# Altium PCB ConnAdaptor.PcbDoc
Units mm, origin at the board's own origin, x right, y up, seen from the top; angles counter-clockwise.
Board outline 92.27 x 10.53 mm, 2 copper layers (Top Layer, Bottom Layer); 2 components, 0 nets, 144 pads, 0 vias.
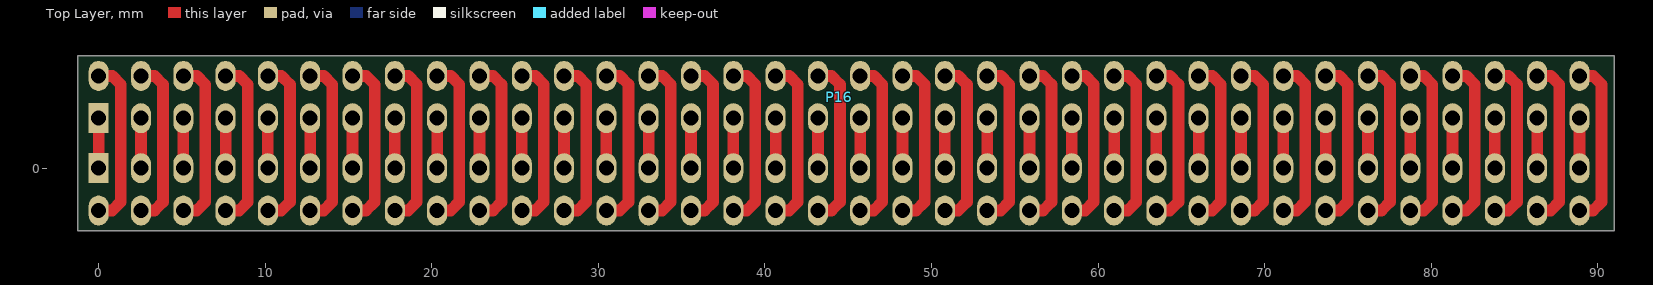
[diagram p0: Top Layer view]
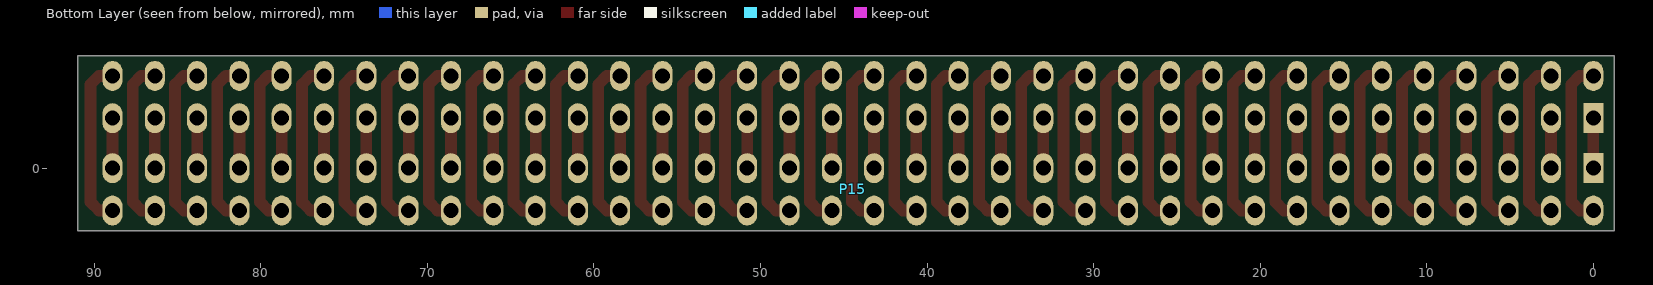
[diagram p1: Bottom Layer view, seen from below]

## Layer stack, top to bottom
Top Solder: solder mask 0.0102, Solder Resist, Dk 3.5
Top Layer: signal copper 0.0356
Dielectric1: dielectric 0.32, FR-4, Dk 4.8
Bottom Layer: signal copper 0.0356
Bottom Solder: solder mask 0.0102, Solder Resist, Dk 3.5

## Board outline
-1.27,-3.765 -1.27,6.765 91,6.765 91,-3.765

## Design rules (kind name [scope] priority, off if disabled: settings)
AcuteAngle [All] p1 off: minimum=8.80000000000000E+0001 checktracksonly=FALSE
Clearance Clearance_Normal [All] p1: gap=0.15 ignorepadtopadclearanceinfootprint=FALSE except(0: Arc-Hole Track-Hole SMDPad-Hole THPad-Hole Via-Hole Fill-Hole Poly-Hole Region-Hole Text-Hole)
ComponentClearance [All] p1: gap=0.2 collisioncheckmode=3 verticalgap=0.2 showdistances=FALSE
FabricationTestPointUsage TestPointUsage [All] p1: valid=0 allowmultiple=FALSE
FabricationTestpoint Testpoint [All] p1: side=3 testpointundercomponent=TRUE minsize=1.016 maxsize=2.54 preferedsize=1.524 minholesize=0 maxholesize=1.016 preferedholesize=0.813 testpointgrid=0.025 allowsidetop=TRUE allowsidebottom=TRUE usegrid=TRUE gridtolerance=0
Height [All] p1 off: minheight=0 maxheight=25.4 prefheight=12.7
HoleSize [All] p1: absolutevalues=TRUE maxlimit=6 minlimit=0.3 maxpercent=80.000 minpercent=20.000
MinimumAnnularRing [All] p1: minimumring=0.15
MinimumSolderMaskSliver [All] p1: minsoldermaskwidth=0.2
PlaneClearance [All] p1: clearance=0.4
PlaneConnect [All] p1: planeconnectstyle=Relief reliefexpansion=0.508 reliefentries=4 reliefconductorwidth=0.2 reliefairgap=0.254
PolygonConnect PolygonConnect_Via [IsVia] p1: connectstyle=Direct reliefconductorwidth=0.254 reliefentries=4 polygonreliefangle="90 Angle" airgapwidth=0.254
PolygonConnect [All] p2: connectstyle=Relief reliefconductorwidth=0.2 reliefentries=4 polygonreliefangle="90 Angle" airgapwidth=0.254
RoutingCorners [All] p1: cornerstyle=45-Degree minsetback=1 maxsetback=2.54
RoutingVias [All] p1: holewidth=0.3 width=0.6 viastyle="Through Hole" minholewidth=0.3 minwidth=0.6 maxholewidth=1 maxwidth=4
SMDToCorner [All] p1 off: distance=78740
SMDToPlane [All] p1 off: distance=118110
SilkToSilkClearance [All] p1: silktosilkclearance=0.2
SilkToSolderMaskClearance SilkscreenOverComponentPads [IsPad] p1: minsilkscreentomaskgap=0.2 clearancetoexposedcopper=TRUE
SolderMaskExpansion SolderMaskExpansion_Via [isVia] p1: expansion=-5
SolderMaskExpansion [All] p2: expansion=0.05
ViasUnderSMD [All] p1: allowed=FALSE
Width [All] p1: maxlimit=5 minlimit=0.15 preferedwidth=0.2 minimp=50.000000 maximp=50.000000 favimp=50.000000
19 further rules are at their usual default settings.

## Components (designator, comment, footprint, x,y, rotation, side; value= is the part's Value field where it differs from the comment)
P15 "Header 2x36" HEADER2x36-2.54 0,0 r0 bottom
P16 "Header 2x36" HEADER2x36-2.54 0,3 r0 top (schematic designator P15)

## Footprints (in the part's own frame and the unit in brackets; to place one, negate y for a bottom-side part, rotate by r counter-clockwise, add the part's x,y. Pads: shape width x height; smd on the part's side, far side on the other; paste and mask are expansions set on the pad)
HEADER2x36-2.54 [mm] "Connector; Header; 50 Positions"
  rect 1.2x1.8 hole 0.9: 1(0,0)
  oval 1.2x1.8 hole 0.9: 2(0,2.54) 3(2.54,0) 4(2.54,2.54) 5(5.08,0) 6(5.08,2.54) 7(7.62,0) 8(7.62,2.54) 9(10.16,0) 10(10.16,2.54) 11(12.7,0) 12(12.7,2.54) 13(15.24,0) 14(15.24,2.54) 15(17.78,0) 16(17.78,2.54) 17(20.32,0) 18(20.32,2.54) 19(22.86,0) 20(22.86,2.54) 21(25.4,0) 22(25.4,2.54) 23(27.94,0) 24(27.94,2.54) 25(30.48,0) 26(30.48,2.54) 27(33.02,0) 28(33.02,2.54) 29(35.56,0) 30(35.56,2.54) 31(38.1,0) 32(38.1,2.54) 33(40.64,0) 34(40.64,2.54) 35(43.18,0) 36(43.18,2.54) 37(45.72,0) 38(45.72,2.54) 39(48.26,0) 40(48.26,2.54) 41(50.8,0) 42(50.8,2.54) 43(53.34,0) 44(53.34,2.54) 45(55.88,0) 46(55.88,2.54) 47(58.42,0) 48(58.42,2.54) 49(60.96,0) 50(60.96,2.54) 51(63.5,0) 52(63.5,2.54) 53(66.04,0) 54(66.04,2.54) 55(68.58,0) 56(68.58,2.54) 57(71.12,0) 58(71.12,2.54) 59(73.66,0) 60(73.66,2.54) 61(76.2,0) 62(76.2,2.54) 63(78.74,0) 64(78.74,2.54) 65(81.28,0) 66(81.28,2.54) 67(83.82,0) 68(83.82,2.54) 69(86.36,0) 70(86.36,2.54) 71(88.9,0) 72(88.9,2.54)

## Nets (pads, with @x,y where several pads share a name; then routed paths per layer and width w, separated by ;. In a path a pad name is that pad's centre, name@x,y a point inside that pad or via, vN(x,y) a via of type N, cw(c..) or ccw(c..) an arc to the next point about the centre after c; other vN are vias at no path point)
pads on no net: P15.1 P15.2 P15.3 P15.4 P15.5 P15.6 P15.7 P15.8 P15.9 P15.10 P15.11 P15.12 P15.13 P15.14 P15.15 P15.16 P15.17 P15.18 P15.19 P15.20 P15.21 P15.22 P15.23 P15.24 P15.25 P15.26 P15.27 P15.28 P15.29 P15.30 P15.31 P15.32 P15.33 P15.34 P15.35 P15.36 P15.37 P15.38 P15.39 P15.40 P15.41 P15.42 P15.43 P15.44 P15.45 P15.46 P15.47 P15.48 P15.49 P15.50 P15.51 P15.52 P15.53 P15.54 P15.55 P15.56 P15.57 P15.58 P15.59 P15.60 P15.61 P15.62 P15.63 P15.64 P15.65 P15.66 P15.67 P15.68 P15.69 P15.70 P15.71 P15.72 P16.1 P16.2 P16.3 P16.4 P16.5 P16.6 P16.7 P16.8 P16.9 P16.10 P16.11 P16.12 P16.13 P16.14 P16.15 P16.16 P16.17 P16.18 P16.19 P16.20 P16.21 P16.22 P16.23 P16.24 P16.25 P16.26 P16.27 P16.28 P16.29 P16.30 P16.31 P16.32 P16.33 P16.34 P16.35 P16.36 P16.37 P16.38 P16.39 P16.40 P16.41 P16.42 P16.43 P16.44 P16.45 P16.46 P16.47 P16.48 P16.49 P16.50 P16.51 P16.52 P16.53 P16.54 P16.55 P16.56 P16.57 P16.58 P16.59 P16.60 P16.61 P16.62 P16.63 P16.64 P16.65 P16.66 P16.67 P16.68 P16.69 P16.70 P16.71 P16.72
copper on no net: | length 469.1
  Top Layer w0.5: 1.325,-2.025 1.325,-1.925
  Top Layer w0.7: 0,-2.54 0.81,-2.54 1.325,-2.025 ; 0,0 0,3 ; 0,5.54 0.81,5.54 1.325,5.025 1.325,-1.925 ; 2.54,-2.54 3.35,-2.54 3.865,-2.025 ; 2.54,0 2.54,3 ; 2.54,5.54 3.35,5.54 3.865,5.025 3.865,-1.925 ; 5.08,-2.54 5.89,-2.54 6.405,-2.025 ; 5.08,0 5.08,3 ; 5.08,5.54 5.89,5.54 6.405,5.025 6.405,-1.925 ; 7.62,-2.54 8.43,-2.54 8.945,-2.025 ; 7.62,0 7.62,3 ; 7.62,5.54 8.43,5.54 8.945,5.025 8.945,-1.925 ; 10.16,-2.54 10.97,-2.54 11.485,-2.025 ; 10.16,0 10.16,3 ; 10.16,5.54 10.97,5.54 11.485,5.025 11.485,-1.925 ; 12.7,-2.54 13.51,-2.54 14.025,-2.025 ; 12.7,0 12.7,3 ; 12.7,5.54 13.51,5.54 14.025,5.025 14.025,-1.925 ; 15.24,-2.54 16.05,-2.54 16.565,-2.025 ; 15.24,0 15.24,3 ; 15.24,5.54 16.05,5.54 16.565,5.025 16.565,-1.925 ; 17.78,-2.54 18.59,-2.54 19.105,-2.025 ; 17.78,0 17.78,3 ; 17.78,5.54 18.59,5.54 19.105,5.025 19.105,-1.925 ; 20.32,-2.54 21.13,-2.54 21.645,-2.025 ; 20.32,0 20.32,3 ; 20.32,5.54 21.13,5.54 21.645,5.025 21.645,-1.925 ; 22.86,-2.54 23.67,-2.54 24.185,-2.025 ; 22.86,0 22.86,3 ; 22.86,5.54 23.67,5.54 24.185,5.025 24.185,-1.925 ; 25.4,-2.54 26.21,-2.54 26.725,-2.025 ; 25.4,0 25.4,3 ; 25.4,5.54 26.21,5.54 26.725,5.025 26.725,-1.925 ; 27.94,-2.54 28.75,-2.54 29.265,-2.025 ; 27.94,0 27.94,3 ; 27.94,5.54 28.75,5.54 29.265,5.025 29.265,-1.925 ; 30.48,-2.54 31.29,-2.54 31.805,-2.025 ; 30.48,0 30.48,3 ; 30.48,5.54 31.29,5.54 31.805,5.025 31.805,-1.925 ; 33.02,-2.54 33.83,-2.54 34.345,-2.025 ; 33.02,0 33.02,3 ; 33.02,5.54 33.83,5.54 34.345,5.025 34.345,-1.925 ; 35.56,-2.54 36.37,-2.54 36.885,-2.025 ; 35.56,0 35.56,3 ; 35.56,5.54 36.37,5.54 36.885,5.025 36.885,-1.925 ; 38.1,-2.54 38.91,-2.54 39.425,-2.025 ; 38.1,0 38.1,3 ; 38.1,5.54 38.91,5.54 39.425,5.025 39.425,-1.925 ; 40.64,-2.54 41.45,-2.54 41.965,-2.025 ; 40.64,0 40.64,3 ; 40.64,5.54 41.45,5.54 41.965,5.025 41.965,-1.925 ; 43.18,-2.54 43.99,-2.54 44.505,-2.025 ; 43.18,0 43.18,3 ; 43.18,5.54 43.99,5.54 44.505,5.025 44.505,-1.925 ; 45.72,-2.54 46.53,-2.54 47.045,-2.025 ; 45.72,0 45.72,3 ; 45.72,5.54 46.53,5.54 47.045,5.025 47.045,-1.925 ; 48.26,-2.54 49.07,-2.54 49.585,-2.025 ; 48.26,0 48.26,3 ; 48.26,5.54 49.07,5.54 49.585,5.025 49.585,-1.925 ; 50.8,-2.54 51.61,-2.54 52.125,-2.025 ; 50.8,0 50.8,3 ; 50.8,5.54 51.61,5.54 52.125,5.025 52.125,-1.925 ; 53.34,-2.54 54.15,-2.54 54.665,-2.025 ; 53.34,0 53.34,3 ; 53.34,5.54 54.15,5.54 54.665,5.025 54.665,-1.925 ; 55.88,-2.54 56.69,-2.54 57.205,-2.025 ; 55.88,0 55.88,3 ; 55.88,5.54 56.69,5.54 57.205,5.025 57.205,-1.925 ; 58.42,-2.54 59.23,-2.54 59.745,-2.025 ; 58.42,0 58.42,3 ; 58.42,5.54 59.23,5.54 59.745,5.025 59.745,-1.925 ; 60.96,-2.54 61.77,-2.54 62.285,-2.025 ; 60.96,0 60.96,3 ; 60.96,5.54 61.77,5.54 62.285,5.025 62.285,-1.925 ; 63.5,-2.54 64.31,-2.54 64.825,-2.025 ; 63.5,0 63.5,3 ; 63.5,5.54 64.31,5.54 64.825,5.025 64.825,-1.925 ; 66.04,-2.54 66.85,-2.54 67.365,-2.025 ; 66.04,0 66.04,3 ; 66.04,5.54 66.85,5.54 67.365,5.025 67.365,-1.925 ; 68.58,-2.54 69.39,-2.54 69.905,-2.025 ; 68.58,0 68.58,3 ; 68.58,5.54 69.39,5.54 69.905,5.025 69.905,-1.925 ; 71.12,-2.54 71.93,-2.54 72.445,-2.025 ; 71.12,0 71.12,3 ; 71.12,5.54 71.93,5.54 72.445,5.025 72.445,-1.925 ; 73.66,-2.54 74.47,-2.54 74.985,-2.025 ; 73.66,0 73.66,3 ; 73.66,5.54 74.47,5.54 74.985,5.025 74.985,-1.925 ; 76.2,-2.54 77.01,-2.54 77.525,-2.025 ; 76.2,0 76.2,3 ; 76.2,5.54 77.01,5.54 77.525,5.025 77.525,-1.925 ; 78.74,-2.54 79.55,-2.54 80.065,-2.025 ; 78.74,0 78.74,3 ; 78.74,5.54 79.55,5.54 80.065,5.025 80.065,-1.925 ; 81.28,-2.54 82.09,-2.54 82.605,-2.025 ; 81.28,0 81.28,3 ; 81.28,5.54 82.09,5.54 82.605,5.025 82.605,-1.925 ; 83.82,-2.54 84.63,-2.54 85.145,-2.025 ; 83.82,0 83.82,3 ; 83.82,5.54 84.63,5.54 85.145,5.025 85.145,-1.925 ; 86.36,-2.54 87.17,-2.54 87.685,-2.025 ; 86.36,0 86.36,3 ; 86.36,5.54 87.17,5.54 87.685,5.025 87.685,-1.925 ; 88.9,-2.54 89.71,-2.54 90.225,-2.025 ; 88.9,0 88.9,3 ; 88.9,5.54 89.71,5.54 90.225,5.025 90.225,-1.925

## Silkscreen, mask and mechanical layers (free items; w line width, h text height)
Outline:
  the board outline again, w0.1